# Altium PCB SO020100001_001.PcbDoc
Units mm, origin at the board's own origin, x right, y up, seen from the top; angles counter-clockwise.
Board outline 90 x 60 mm, 2 copper layers (Top Layer, Bottom Layer), stack 1.455 mm thick; 192 components, 104 nets, 470 pads, 27 vias.
Unrouted connection lines stored in the file: 164.
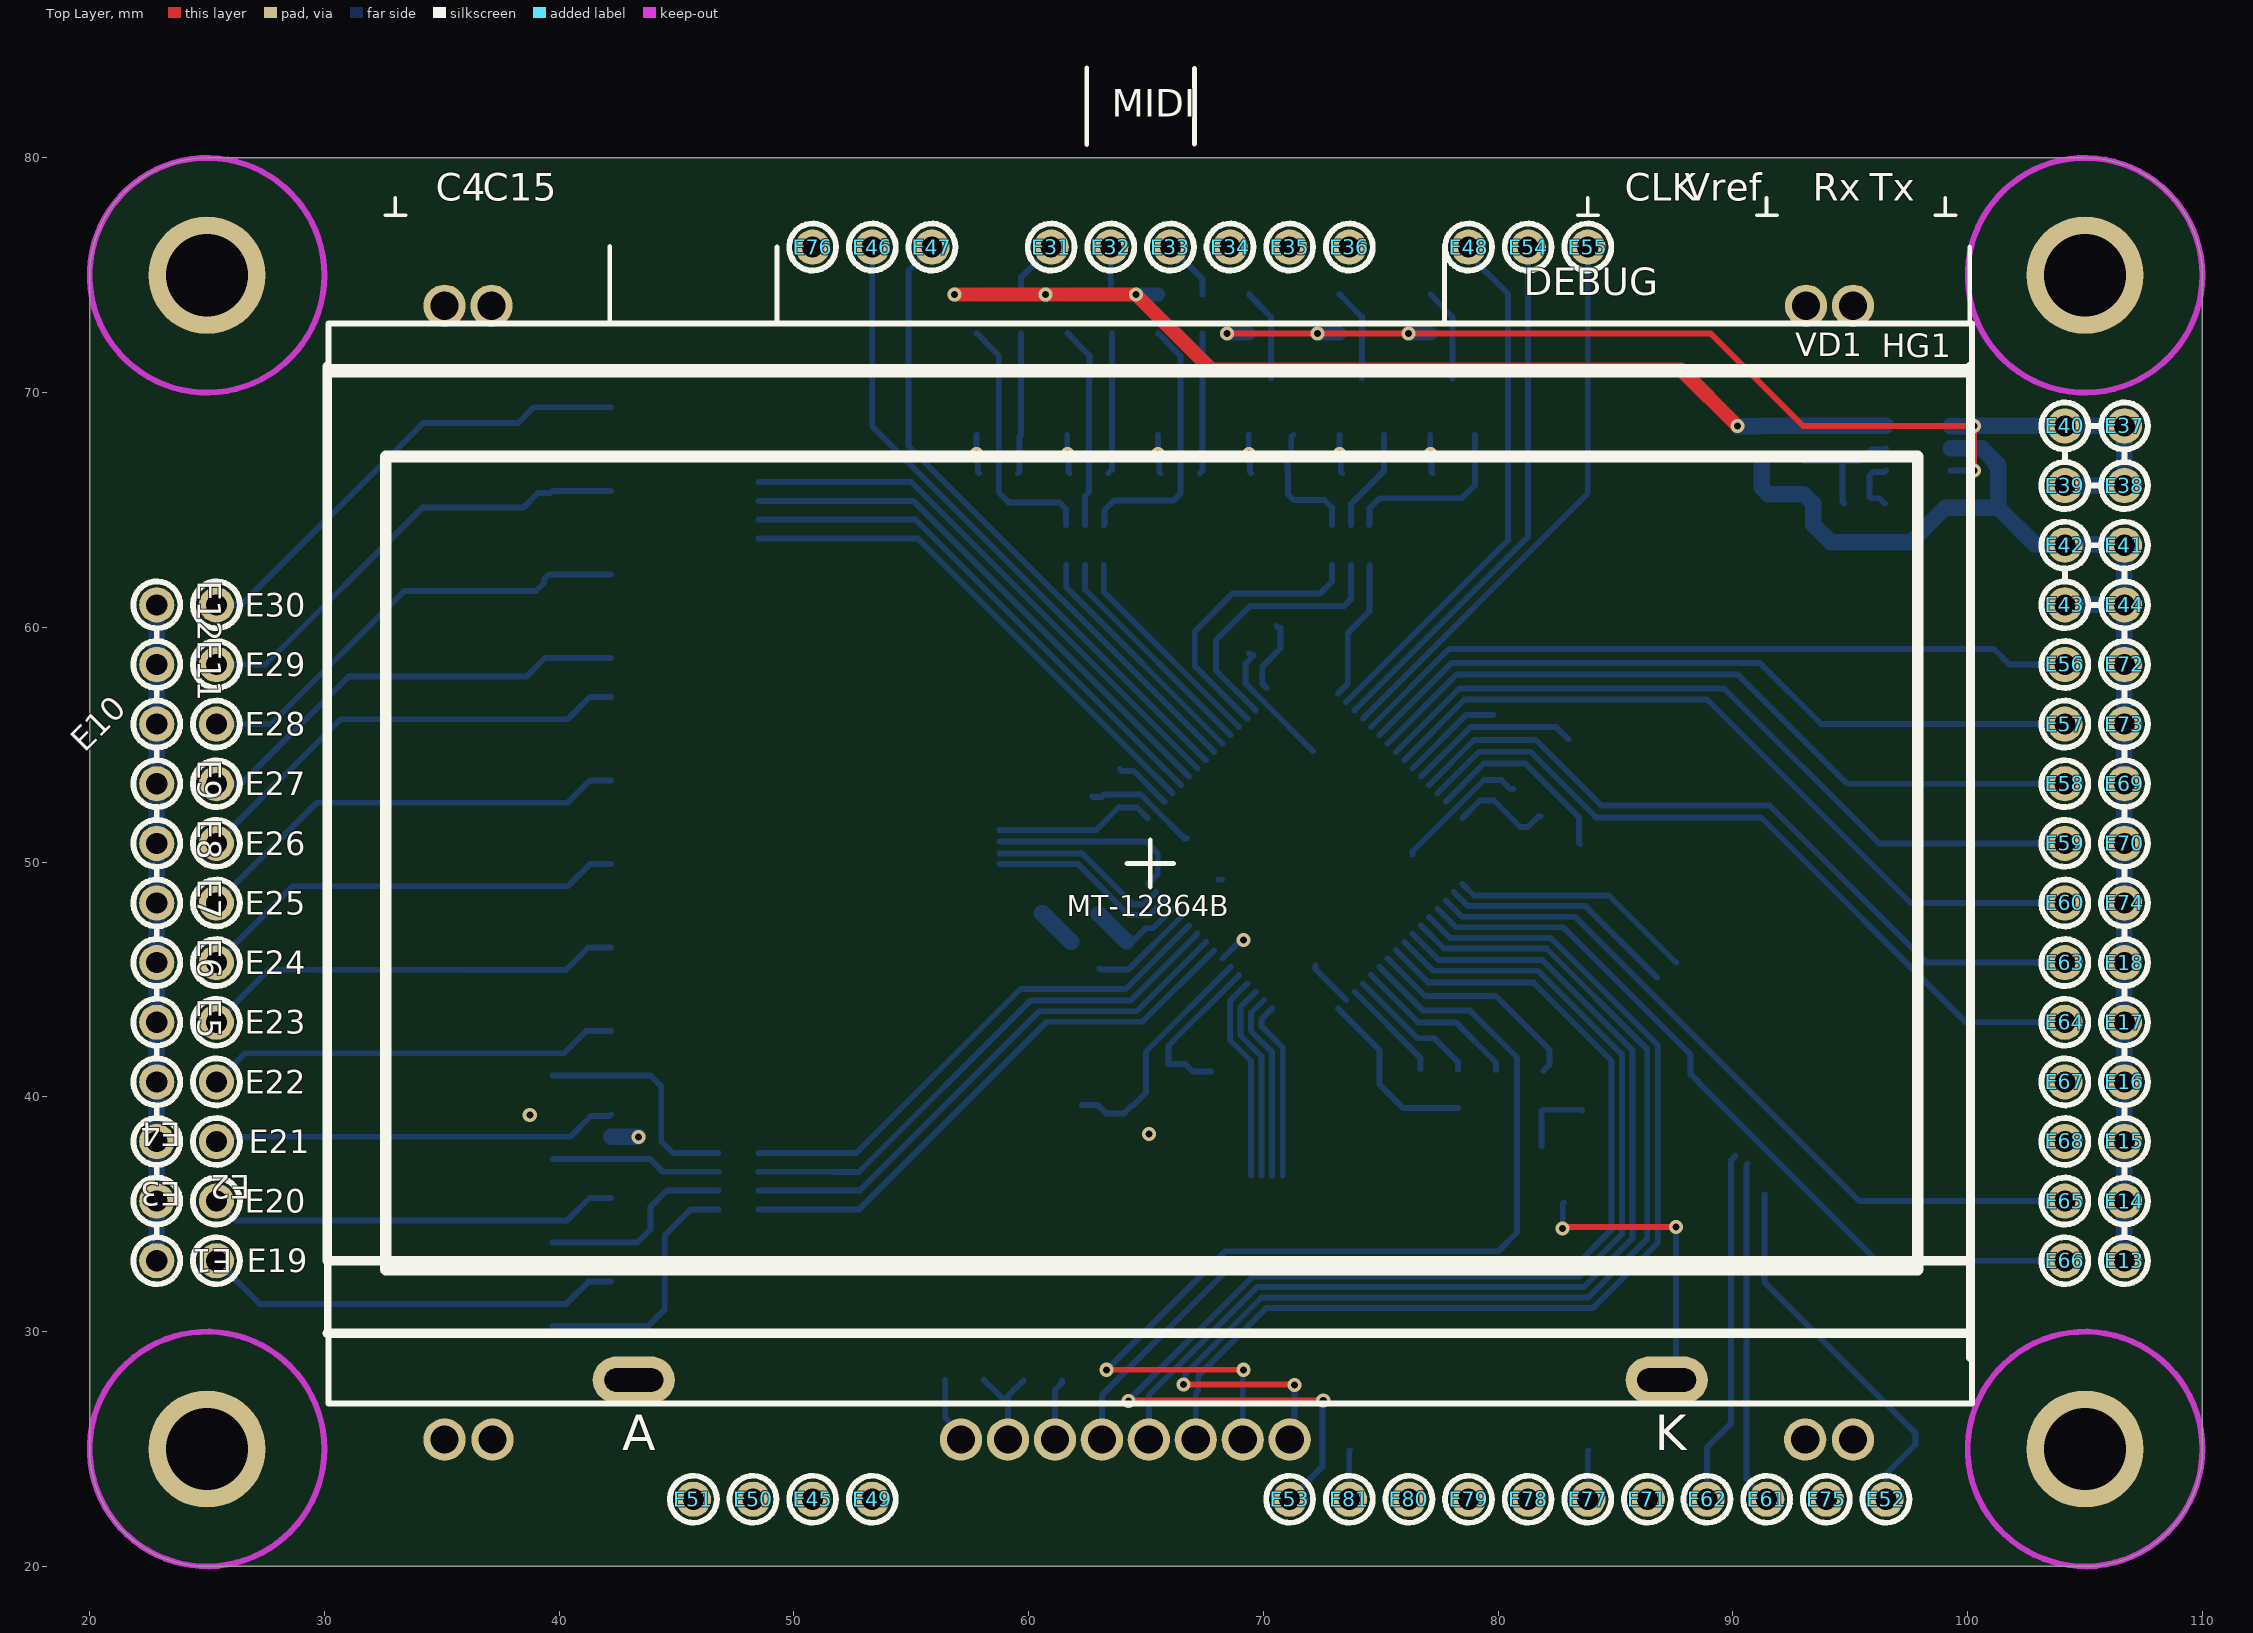
[diagram p0: Top Layer view]
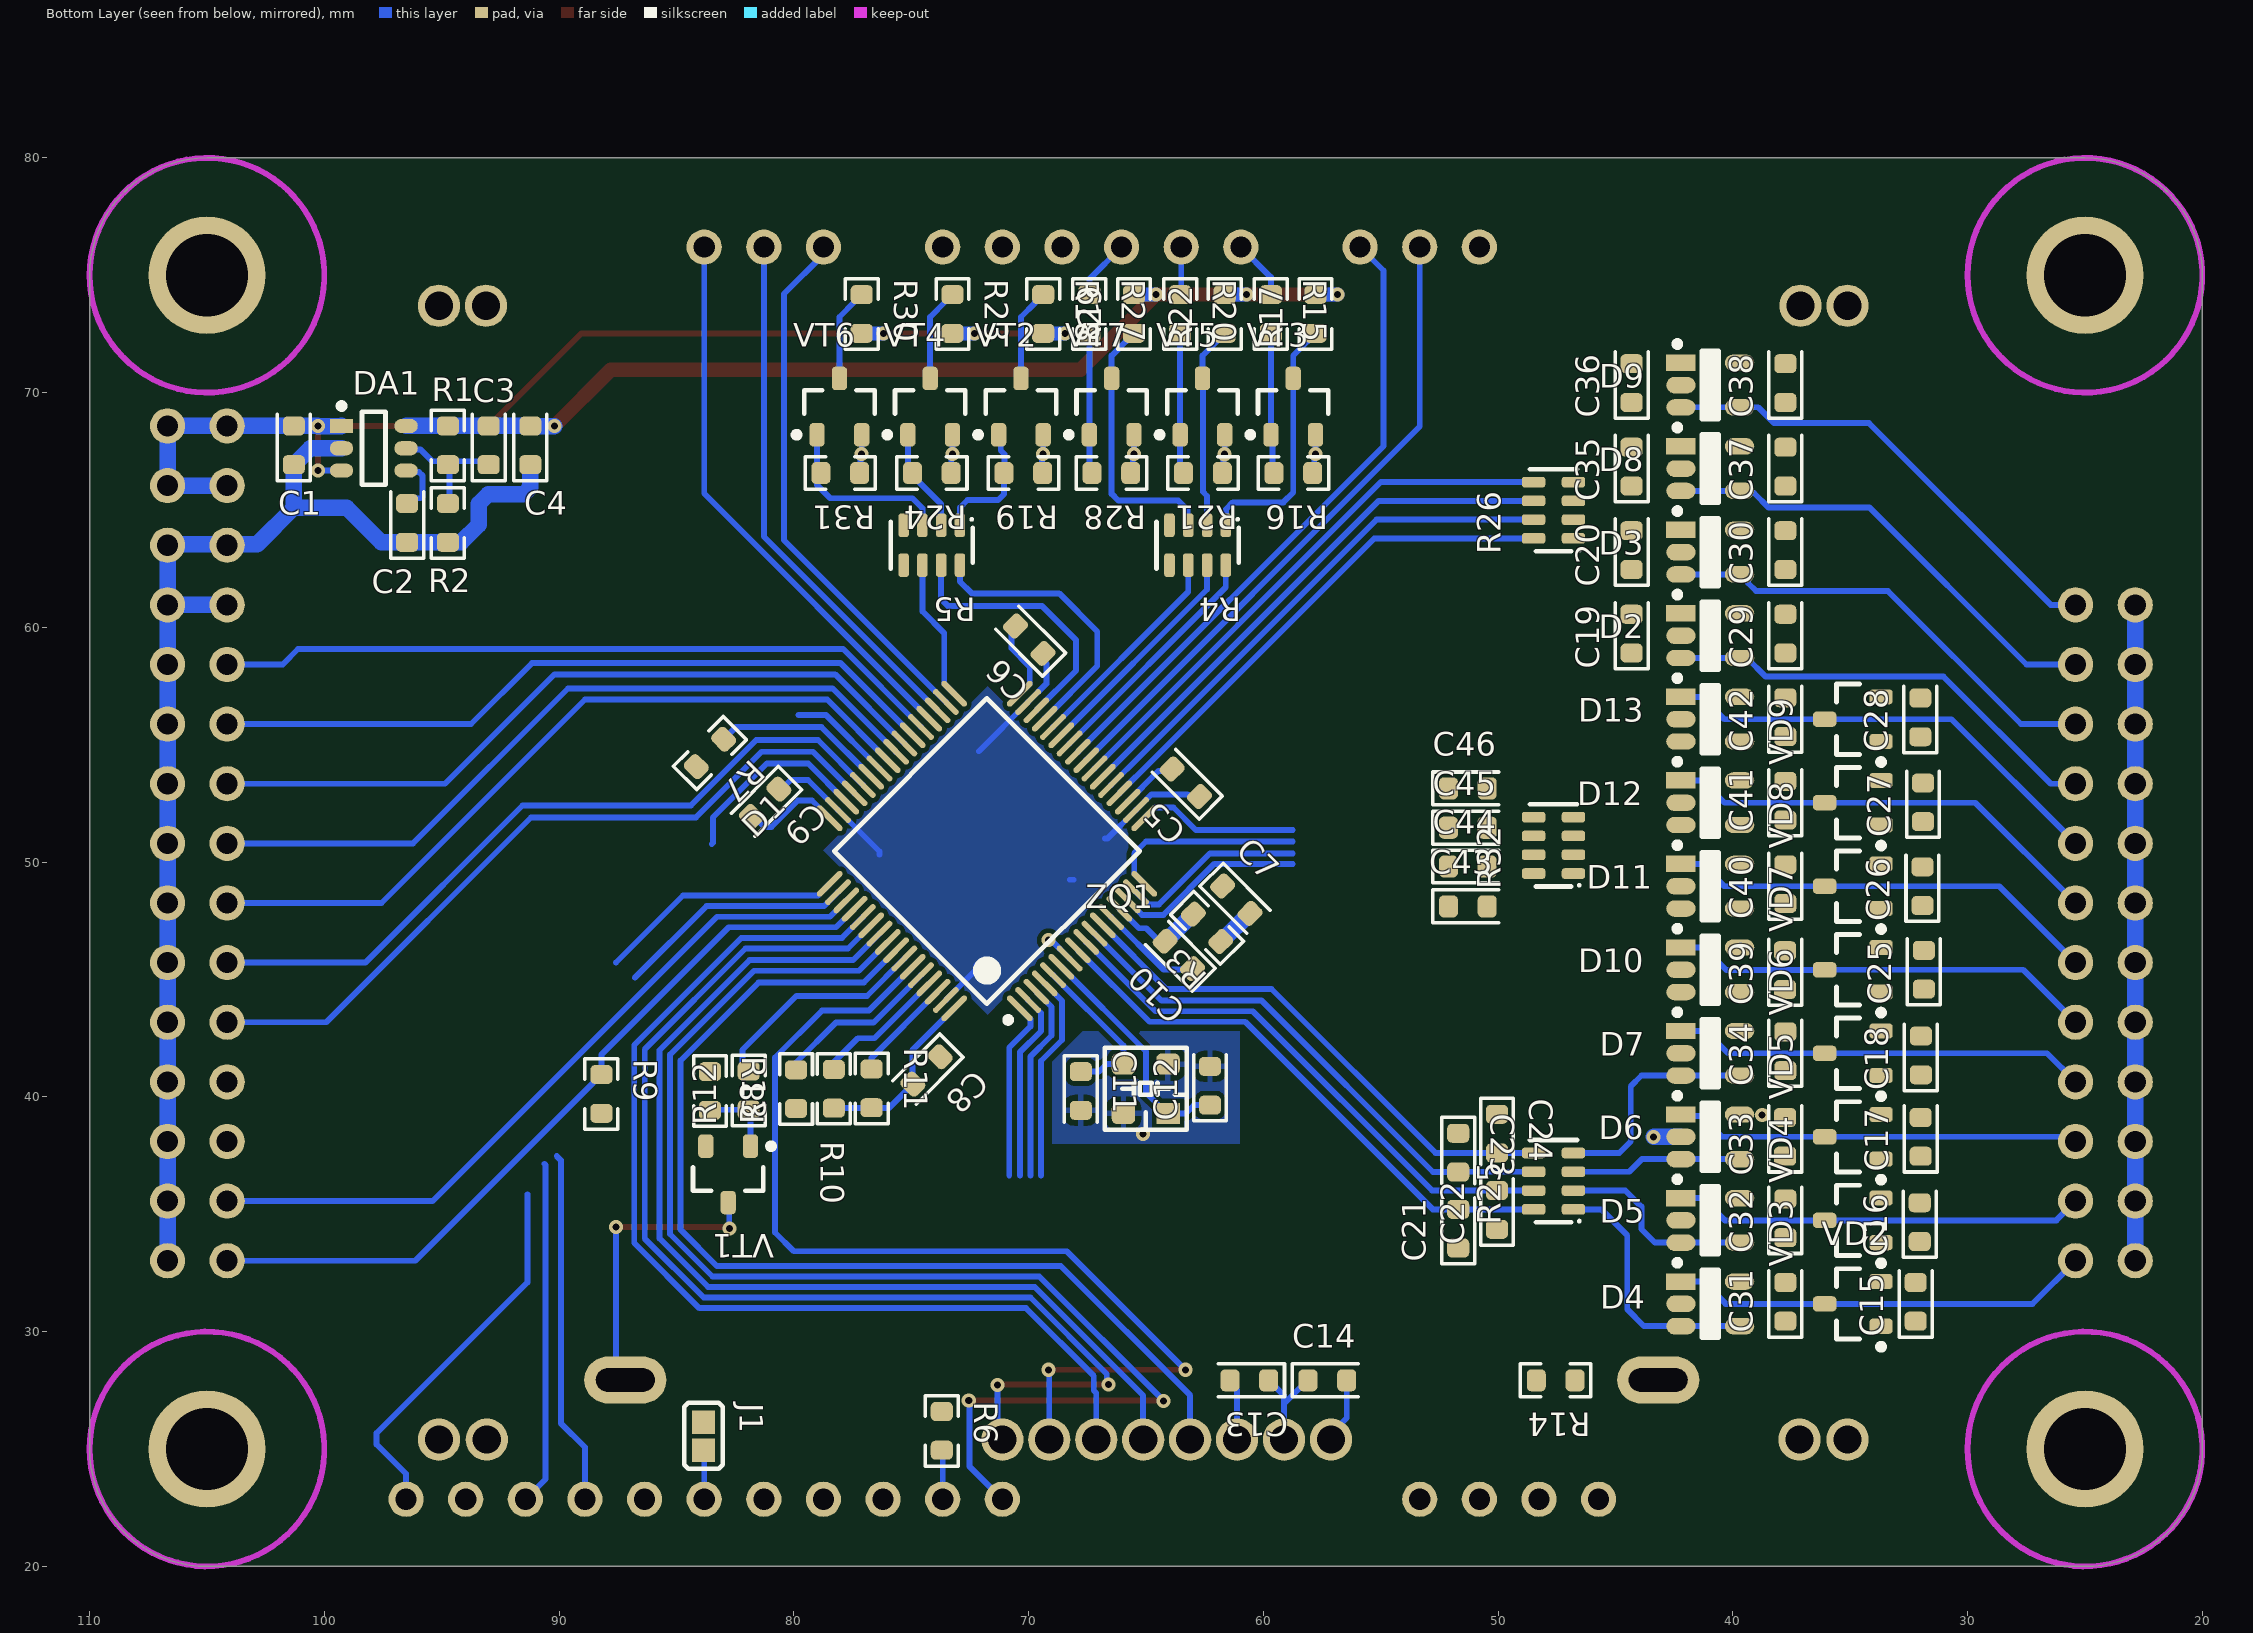
[diagram p1: Bottom Layer view, seen from below]
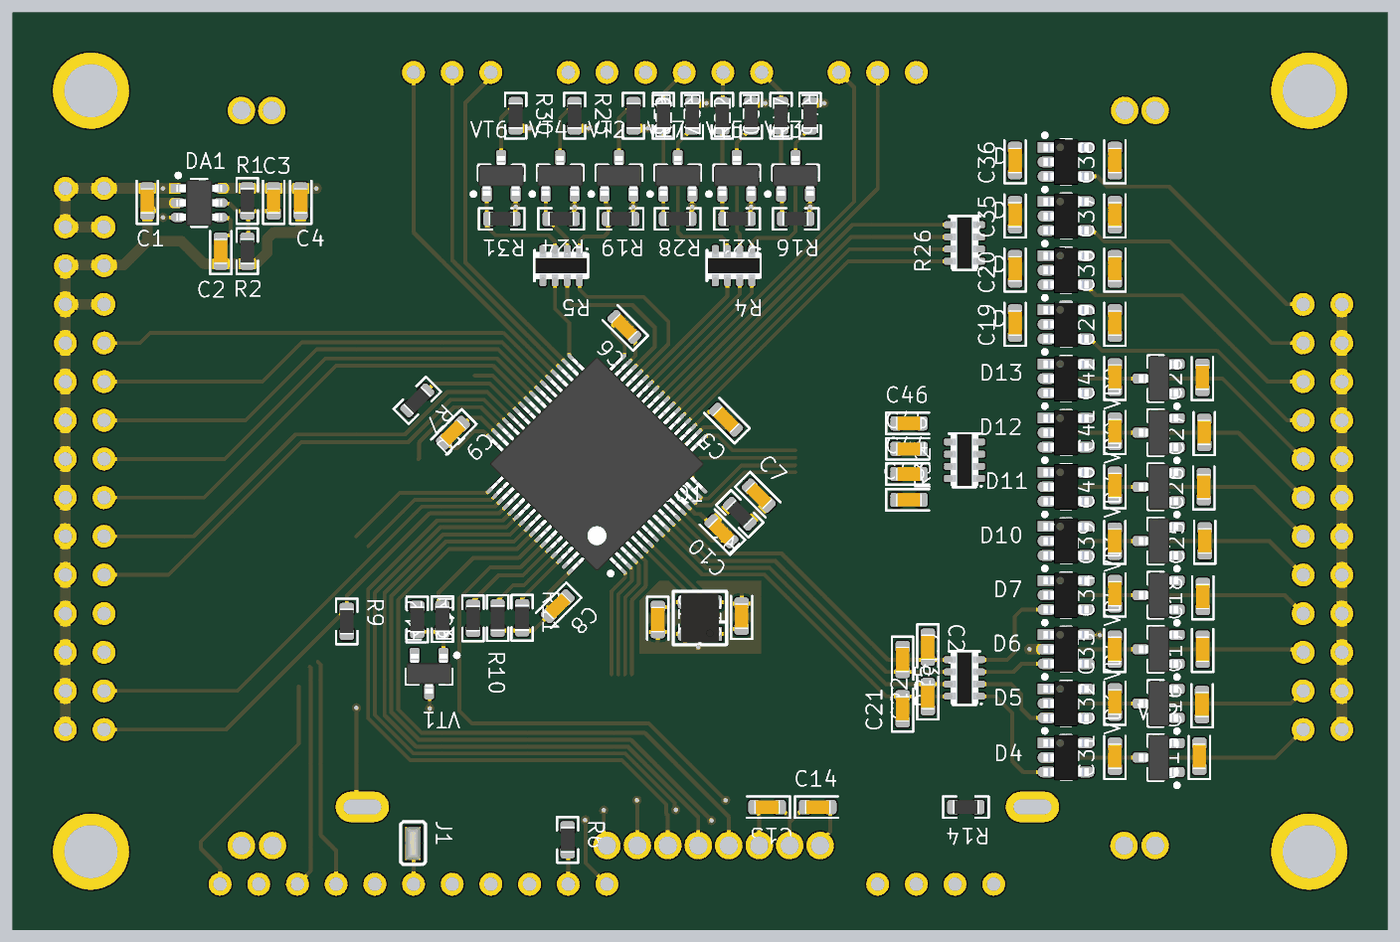
[diagram p2: 3D render of the assembled board from below, using the file's embedded part models]

## Layer stack, top to bottom
Top Solder: solder mask 0.0254, SM-001, Dk 4
Top Layer: signal copper 0.018
Dielectric 1: core 1.4186, Core-043, Dk 4.3
Bottom Layer: signal copper 0.018
Bottom Solder: solder mask 0.0254, SM-001, Dk 4

## Board outline
20,25 20,75 cw(c25,75) 25,80 105,80 cw(c105,75) 110,75 110,25 cw(c105,25) 105,20 25,20 cw(c25,25)

## Design rules (kind name [scope] priority, off if disabled: settings)
Clearance [All] p1: gap=0.2 ignorepadtopadclearanceinfootprint=FALSE
ComponentClearance [All] p1: gap=0.25 collisioncheckmode=3 verticalgap=0.254 showdistances=FALSE
DiffPairsRouting [All] p1: maxlimit=0.3 minlimit=0.25 mostfreqgap=0.25 toplayer_minwidth=0.2 toplayer_maxwidth=0.3 toplayer_prefwidth=0.25 bottomlayer_minwidth=0.2 bottomlayer_maxwidth=0.3 bottomlayer_prefwidth=0.25 maxuncoupledlength=12.7
Height [All] p1: minheight=0 maxheight=30 prefheight=12.7
HoleSize [All] p1: absolutevalues=TRUE maxlimit=10 minlimit=0.025 maxpercent=80.000 minpercent=20.000
PlaneClearance [All] p1: clearance=0.2
PlaneConnect [All] p1: planeconnectstyle=Direct reliefexpansion=0.508 reliefentries=4 reliefconductorwidth=0.254 reliefairgap=0.254
PolygonConnect [All] p1: thpad.connectstyle=Relief thpad.reliefconductorwidth=0.25 thpad.reliefentries=4 thpad.polygonreliefangle="90 Angle" thpad.airgapwidth=0.25 smdpad.connectstyle=Relief smdpad.reliefconductorwidth=0.25 smdpad.reliefentries=4 smdpad.polygonreliefangle="90 Angle" smdpad.airgapwidth=0.25 via.connectstyle=Relief via.reliefconductorwidth=0.25 via.reliefentries=4 via.polygonreliefangle="90 Angle" via.airgapwidth=-0.1
RoutingCorners [All] p1: cornerstyle=45-Degree minsetback=1 maxsetback=2.5
RoutingVias [All] p1: holewidth=0.3 width=0.6 viastyle="Through Hole" minholewidth=0.3 minwidth=0.6 maxholewidth=0.3 maxwidth=0.6
SolderMaskExpansion [All] p1: expansion=0.102 istentingtop=FALSE
UnRoutedNet [All] p1: checkbadconnections=TRUE
Width [All] p1: maxlimit=3 minlimit=0.2 preferedwidth=0.3
22 further rules are at their usual default settings.

## Classes and differential pairs
component class main: C1 C2 C3 C4 C5 C6 C7 C8 C9 C10 C11 C12 C13 C14 D1 DA1 E1 E2 E3 E4 E5 E6 E7 E8 E9 E10 E11 E12 E13 E14 E15 E16 E17 E18 E19 E20 E21 E22 E23 E24 E25 E26 E27 E28 E29 E30 E31 E32 E33 E34 E35 E36 E37 E38 E39 E40 E41 E42 E43 E44 E45 E46 E47 E48 E49 E50 E51 E52 E53 E54 E55 E56 E57 E58 E59 E60 E61 E62 E63 E64 E65 E66 E67 E68 E69 E70 E71 E72 E73 E74 E75 E76 E77 E78 E79 E80 E81 HG1 J1 R1 R2 R3 R4 R5 R6 R7 R8 R9 R10 R11 R12 R13 R14 VD1 VT1 ZQ1
component class A1: C15 C16 C17 C18 C19 C20 C21 C22 C23 C24 C25 C26 C27 C28 C29 C30 C31 C32 C33 C34 C35 C36 C37 C38 C39 C40 C41 C42 C43 C44 C45 C46 D2 D3 D4 D5 D6 D7 D8 D9 D10 D11 D12 D13 R15 R16 R17 R18 R19 R20 R21 R22 R23 R24 R25 R26 R27 R28 R29 R30 R31 R32 VD2 VD3 VD4 VD5 VD6 VD7 VD8 VD9 VT2 VT3 VT4 VT5 VT6 VT7

## Components (designator, comment, footprint, x,y, rotation, side; value= is the part's Value field where it differs from the comment)
C1 "C0603_16v_1u" CAPC1608X08L 101.3,67.755 r90 bottom value="1 мкФ"
C2 "C0603_50v_0,01u" CAPC1608X08L 96.475,64.45 r90 bottom value="0.01 мкФ"
C3 "C0603_50v_15p" CAPC1608X08L 93,67.755 r90 bottom value="15 пФ"
C4 "C0603_16v_1u" CAPC1608X08L 91.225,67.755 r90 bottom value="1 мкФ"
C5 "C0603_50v_0,1u" CAPC1608X08L 63.301,53.381 r45 bottom value="0.1 мкФ"
C6 "C0603_50v_0,1u" CAPC1608X08L 69.975,59.475 r45 bottom value="0.1 мкФ"
C7 "C0603_50v_0,1u" CAPC1608X08L 61.15,48.4 r225 bottom value="0.1 мкФ"
C8 "C0603_50v_0,1u" CAPC1608X08L 74.35,41.125 r315 bottom value="0.1 мкФ"
C9 "C0603_50v_0,1u" CAPC1608X08L 81.225,52.525 r315 bottom value="0.1 мкФ"
C10 "C0603_50v_0,1u" CAPC1608X08L 63.599,46.048 r45 bottom value="0.1 мкФ"
C11 "C0603_50v_15p" CAPC1608X08L 67.775,40.25 r270 bottom value="15 пФ"
C12 "C0603_50v_15p" CAPC1608X08L 62.275,40.475 r90 bottom value="15 пФ"
C13 "C0603_50v_0,1u" CAPC1608X08L 60.6,27.925 r0 bottom value="0.1 мкФ"
C14 "C0603_50v_0,1u" CAPC1608X08L 57.275,27.925 r180 bottom value="0.1 мкФ"
C15 "C0603_16v_1u" CAPC1608X08L 32.215,31.271 r90 bottom value="1 мкФ"
C16 "C0603_16v_1u" CAPC1608X08L 32.04,34.665 r90 bottom value="1 мкФ"
C17 "C0603_16v_1u" CAPC1608X08L 32,38.3 r90 bottom value="1 мкФ"
C18 "C0603_16v_1u" CAPC1608X08L 31.99,41.765 r90 bottom value="1 мкФ"
C19 "C0603_16v_1u" CAPC1608X08L 44.315,59.734 r90 bottom value="1 мкФ"
C20 "C0603_16v_1u" CAPC1608X08L 44.315,63.292 r90 bottom value="1 мкФ"
C21 "C0603_16v_1u" CAPC1608X08L 51.7,34.385 r90 bottom value="1 мкФ"
C22 "C0603_16v_1u" CAPC1608X08L 50.05,35.185 r90 bottom value="1 мкФ"
C23 "C0603_16v_1u" CAPC1608X08L 51.7,37.625 r270 bottom value="1 мкФ"
C24 "C0603_16v_1u" CAPC1608X08L 50.05,38.435 r270 bottom value="1 мкФ"
C25 "C0603_16v_1u" CAPC1608X08L 31.863,45.415 r90 bottom value="1 мкФ"
C26 "C0603_16v_1u" CAPC1608X08L 31.925,48.975 r90 bottom value="1 мкФ"
C27 "C0603_16v_1u" CAPC1608X08L 31.9,52.55 r90 bottom value="1 мкФ"
C28 "C0603_16v_1u" CAPC1608X08L 32.015,56.165 r90 bottom value="1 мкФ"
C29 "C0603_50v_0,1u" CAPC1608X08L 37.765,59.734 r90 bottom value="0.1 мкФ"
C30 "C0603_50v_0,1u" CAPC1608X08L 37.765,63.292 r90 bottom value="0.1 мкФ"
C31 "C0603_50v_0,1u" CAPC1608X08L 37.765,31.271 r90 bottom value="0.1 мкФ"
C32 "C0603_50v_0,1u" CAPC1608X08L 37.765,34.829 r90 bottom value="0.1 мкФ"
C33 "C0603_50v_0,1u" CAPC1608X08L 37.775,38.3 r90 bottom value="0.1 мкФ"
C34 "C0603_50v_0,1u" CAPC1608X08L 37.765,41.945 r90 bottom value="0.1 мкФ"
C35 "C0603_16v_1u" CAPC1608X08L 44.315,66.85 r90 bottom value="1 мкФ"
C36 "C0603_16v_1u" CAPC1608X08L 44.315,70.408 r90 bottom value="1 мкФ"
C37 "C0603_50v_0,1u" CAPC1608X08L 37.765,66.85 r90 bottom value="0.1 мкФ"
C38 "C0603_50v_0,1u" CAPC1608X08L 37.765,70.408 r90 bottom value="0.1 мкФ"
C39 "C0603_50v_0,1u" CAPC1608X08L 37.775,45.4 r90 bottom value="0.1 мкФ"
C40 "C0603_50v_0,1u" CAPC1608X08L 37.765,49.06 r90 bottom value="0.1 мкФ"
C41 "C0603_50v_0,1u" CAPC1608X08L 37.765,52.618 r90 bottom value="0.1 мкФ"
C42 "C0603_50v_0,1u" CAPC1608X08L 37.765,56.176 r90 bottom value="0.1 мкФ"
C43 "C0603_16v_1u" CAPC1608X08L 51.29,48.115 r180 bottom value="1 мкФ"
C44 "C0603_16v_1u" CAPC1608X08L 51.29,49.815 r180 bottom value="1 мкФ"
C45 "C0603_16v_1u" CAPC1608X08L 51.29,51.465 r180 bottom value="1 мкФ"
C46 "C0603_16v_1u" CAPC1608X08L 51.29,53.14 r180 bottom value="1 мкФ"
D1 "STM32F091RB6" TSQFP50P_10x10_64N 71.774,50.473 r135 bottom
D2 "AMP" SOT23-5M 40.965,59.641 r180 bottom
D3 "AMP" SOT23-5M 40.965,63.199 r180 bottom
D4 "AMP" SOT23-5M 40.965,31.178 r180 bottom
D5 "AMP" SOT23-5M 40.965,34.735 r180 bottom
D6 "AMP" SOT23-5M 40.965,38.293 r180 bottom
D7 "AMP" SOT23-5M 40.965,41.851 r180 bottom
D8 "AMP" SOT23-5M 40.965,66.757 r180 bottom
D9 "AMP" SOT23-5M 40.965,70.315 r180 bottom
D10 "AMP" SOT23-5M 40.965,45.409 r180 bottom
D11 "AMP" SOT23-5M 40.965,48.967 r180 bottom
D12 "AMP" SOT23-5M 40.965,52.525 r180 bottom
D13 "AMP" SOT23-5M 40.965,56.083 r180 bottom
DA1 "TPS73001DBVT" SOT95P280X145-6N 97.895,67.63 r180 bottom
E1 "CON 0.9mm" con_0.9mm 22.86,33.02 r180 top
E2 "CON 0.9mm" con_0.9mm 22.86,35.56 r180 top
E3 "CON 0.9mm" con_0.9mm 22.86,38.1 r180 top
E4 "CON 0.9mm" con_0.9mm 22.86,40.64 r180 top
E5 "CON 0.9mm" con_0.9mm 22.86,43.18 r270 top
E6 "CON 0.9mm" con_0.9mm 22.86,45.72 r270 top
E7 "CON 0.9mm" con_0.9mm 22.86,48.26 r270 top
E8 "CON 0.9mm" con_0.9mm 22.86,50.8 r270 top
E9 "CON 0.9mm" con_0.9mm 22.86,53.34 r270 top
E10 "CON 0.9mm" con_0.9mm 22.86,55.88 r270 top
E11 "CON 0.9mm" con_0.9mm 22.86,58.42 r270 top
E12 "CON 0.9mm" con_0.9mm 22.86,60.96 r270 top
E13 "CON 0.9mm" con_0.9mm 106.68,33.02 r180 top
E14 "CON 0.9mm" con_0.9mm 106.68,35.56 r180 top
E15 "CON 0.9mm" con_0.9mm 106.68,38.1 r180 top
E16 "CON 0.9mm" con_0.9mm 106.68,40.64 r180 top
E17 "CON 0.9mm" con_0.9mm 106.68,43.18 r180 top
E18 "CON 0.9mm" con_0.9mm 106.68,45.72 r180 top
E19 "CON 0.9mm" con_0.9mm 25.4,33.02 r0 top
E20 "CON 0.9mm" con_0.9mm 25.4,35.56 r0 top
E21 "CON 0.9mm" con_0.9mm 25.4,38.1 r0 top
E22 "CON 0.9mm" con_0.9mm 25.4,40.64 r0 top
E23 "CON 0.9mm" con_0.9mm 25.4,43.18 r0 top
E24 "CON 0.9mm" con_0.9mm 25.4,45.72 r0 top
E25 "CON 0.9mm" con_0.9mm 25.4,48.26 r0 top
E26 "CON 0.9mm" con_0.9mm 25.4,50.8 r0 top
E27 "CON 0.9mm" con_0.9mm 25.4,53.34 r0 top
E28 "CON 0.9mm" con_0.9mm 25.4,55.88 r0 top
E29 "CON 0.9mm" con_0.9mm 25.4,58.42 r0 top
E30 "CON 0.9mm" con_0.9mm 25.4,60.96 r0 top
E31 "CON 0.9mm" con_0.9mm 60.96,76.2 r0 top
E32 "CON 0.9mm" con_0.9mm 63.5,76.2 r0 top
E33 "CON 0.9mm" con_0.9mm 66.04,76.2 r0 top
E34 "CON 0.9mm" con_0.9mm 68.58,76.2 r0 top
E35 "CON 0.9mm" con_0.9mm 71.12,76.2 r0 top
E36 "CON 0.9mm" con_0.9mm 73.66,76.2 r0 top
E37 "CON 0.9mm" con_0.9mm 106.68,68.58 r90 top
E38 "CON 0.9mm" con_0.9mm 106.68,66.04 r0 top
E39 "CON 0.9mm" con_0.9mm 104.14,66.04 r0 top
E40 "CON 0.9mm" con_0.9mm 104.14,68.58 r0 top
E41 "CON 0.9mm" con_0.9mm 106.68,63.5 r0 top
E42 "CON 0.9mm" con_0.9mm 104.14,63.5 r90 top
E43 "CON 0.9mm" con_0.9mm 104.14,60.96 r0 top
E44 "CON 0.9mm" con_0.9mm 106.68,60.96 r0 top
E45 "CON 0.9mm" con_0.9mm 50.8,22.86 r270 top
E46 "CON 0.9mm" con_0.9mm 53.34,76.2 r270 top
E47 "CON 0.9mm" con_0.9mm 55.88,76.2 r270 top
E48 "CON 0.9mm" con_0.9mm 78.74,76.2 r270 top
E49 "CON 0.9mm" con_0.9mm 53.34,22.86 r270 top
E50 "CON 0.9mm" con_0.9mm 48.26,22.86 r270 top
E51 "CON 0.9mm" con_0.9mm 45.72,22.86 r270 top
E52 "CON 0.9mm" con_0.9mm 96.52,22.86 r270 top
E53 "CON 0.9mm" con_0.9mm 71.12,22.86 r270 top
E54 "CON 0.9mm" con_0.9mm 81.28,76.2 r270 top
E55 "CON 0.9mm" con_0.9mm 83.82,76.2 r270 top
E56 "CON 0.9mm" con_0.9mm 104.14,58.42 r180 top
E57 "CON 0.9mm" con_0.9mm 104.14,55.88 r180 top
E58 "CON 0.9mm" con_0.9mm 104.14,53.34 r180 top
E59 "CON 0.9mm" con_0.9mm 104.14,50.8 r180 top
E60 "CON 0.9mm" con_0.9mm 104.14,48.26 r180 top
E61 "CON 0.9mm" con_0.9mm 91.44,22.86 r0 top
E62 "CON 0.9mm" con_0.9mm 88.9,22.86 r0 top
E63 "CON 0.9mm" con_0.9mm 104.14,45.72 r180 top
E64 "CON 0.9mm" con_0.9mm 104.14,43.18 r180 top
E65 "CON 0.9mm" con_0.9mm 104.14,35.56 r180 top
E66 "CON 0.9mm" con_0.9mm 104.14,33.02 r180 top
E67 "CON 0.9mm" con_0.9mm 104.14,40.64 r270 top
E68 "CON 0.9mm" con_0.9mm 104.14,38.1 r270 top
E69 "CON 0.9mm" con_0.9mm 106.68,53.34 r0 top
E70 "CON 0.9mm" con_0.9mm 106.68,50.8 r0 top
E71 "CON 0.9mm" con_0.9mm 86.36,22.86 r0 top
E72 "CON 0.9mm" con_0.9mm 106.68,58.42 r0 top
E73 "CON 0.9mm" con_0.9mm 106.68,55.88 r0 top
E74 "CON 0.9mm" con_0.9mm 106.68,48.26 r0 top
E75 "CON 0.9mm" con_0.9mm 93.98,22.86 r0 top
E76 "CON 0.9mm" con_0.9mm 50.8,76.2 r0 top
E77 "CON 0.9mm" con_0.9mm 83.82,22.86 r0 top
E78 "CON 0.9mm" con_0.9mm 81.28,22.86 r0 top
E79 "CON 0.9mm" con_0.9mm 78.74,22.86 r0 top
E80 "CON 0.9mm" con_0.9mm 76.2,22.86 r0 top
E81 "CON 0.9mm" con_0.9mm 73.66,22.86 r0 top
HG1 "MT-12864" MT-12864 65.12,49.7 r0 top locked
J1 "Jumper_1x1" "jumper 1x1" 83.85,25.55 r270 bottom
R1 "RES0603_51k" RESC1608X04N 94.737,67.755 r90 bottom value="51 кОм"
R2 "RES0603_30k±1%" RESC1608X04N 94.737,64.45 r90 bottom value="30 кОм"
R3 "RES0603_100r" RESC1608X04N 62.4,47.2 r45 bottom value="100 Ом"
R4 "CAT16-470J4" CAC-80P320X160-8N 62.8,63.5 r0 bottom value="47 Ом"
R5 "CAT16-470J4" CAC-80P320X160-8N 74.125,63.5 r0 bottom value="47 Ом"
R6 "RES0603_10k" RESC1608X04N 73.7,25.775 r270 bottom value="10 кОм"
R7 "RES0603_10k" RESC1608X04N 83.575,54.65 r315 bottom value="10 кОм"
R8 "RES0603_10k" RESC1608X04N 79.906,40.328 r90 bottom value="10 кОм"
R9 "RES0603_10k" RESC1608X04N 88.2,40.125 r270 bottom value="10 кОм"
R10 "RES0603_10k" RESC1608X04N 78.297,40.346 r270 bottom value="10 кОм"
R11 "RES0603_10k" RESC1608X04N 76.689,40.363 r270 bottom value="10 кОм"
R12 "RES0603_47R" RESC1608X04N 81.925,40.275 r90 bottom value="47 Ом"
R13 "RES0603_10k" RESC1608X04N 83.575,40.25 r270 bottom value="10 кОм"
R14 "RES0603_47R" RESC1608X04N 47.55,27.925 r0 bottom value="47 Ом"
R15 "RES0603_100r" RESC1608X04N 59.68,73.35 r270 bottom value="100 Ом"
R16 "RES0603_10k" RESC1608X04N 58.725,66.575 r0 bottom value="10 кОм"
R17 "RES0603_10k" RESC1608X04N 57.78,73.35 r90 bottom value="10 кОм"
R18 "RES0603_10k" RESC1608X04N 69.378,73.35 r270 bottom value="10 кОм"
R19 "RES0603_10k" RESC1608X04N 70.225,66.575 r0 bottom value="10 кОм"
R20 "RES0603_100r" RESC1608X04N 63.546,73.35 r270 bottom value="100 Ом"
R21 "RES0603_10k" RESC1608X04N 62.575,66.575 r0 bottom value="10 кОм"
R22 "RES0603_10k" RESC1608X04N 61.646,73.35 r90 bottom value="10 кОм"
R23 "RES0603_10k" RESC1608X04N 73.244,73.35 r270 bottom value="10 кОм"
R24 "RES0603_10k" RESC1608X04N 74.125,66.575 r0 bottom value="10 кОм"
R25 "CAT16-470J4" CAC-80P320X160-8N 47.64,36.41 r90 bottom value="47 Ом"
R26 "CAT16-470J4" CAC-80P320X160-8N 47.64,64.99 r90 bottom value="47 Ом"
R27 "RES0603_100r" RESC1608X04N 67.412,73.35 r270 bottom value="100 Ом"
R28 "RES0603_10k" RESC1608X04N 66.475,66.575 r0 bottom value="10 кОм"
R29 "RES0603_10k" RESC1608X04N 65.512,73.35 r90 bottom value="10 кОм"
R30 "RES0603_10k" RESC1608X04N 77.11,73.35 r270 bottom value="10 кОм"
R31 "RES0603_10k" RESC1608X04N 78.025,66.575 r0 bottom value="10 кОм"
R32 "CAT16-470J4" CAC-80P320X160-8N 47.64,50.715 r90 bottom value="47 Ом"
VD1 "S11-161A-5W" S11-161A-5W 65.18,49.94 r0 top locked
VD2 "BAV199" SOT95P245X110-3N 34.89,31.183 r90 bottom
VD3 "BAV199" SOT95P245X110-3N 34.89,34.741 r90 bottom
VD4 "BAV199" SOT95P245X110-3N 34.89,38.299 r90 bottom
VD5 "BAV199" SOT95P245X110-3N 34.89,41.857 r90 bottom
VD6 "BAV199" SOT95P245X110-3N 34.89,45.415 r90 bottom
VD7 "BAV199" SOT95P245X110-3N 34.89,48.973 r90 bottom
VD8 "BAV199" SOT95P245X110-3N 34.89,52.531 r90 bottom
VD9 "BAV199" SOT95P245X110-3N 34.89,56.089 r90 bottom
VT1 "IRLML2402" SOT95P245X110-3N 82.8,36.7 r0 bottom
VT2 "IRLML2402" SOT95P245X110-3N 70.328,69.405 r180 bottom
VT3 "IRLML2402" SOT95P245X110-3N 58.73,69.405 r180 bottom
VT4 "IRLML2402" SOT95P245X110-3N 74.194,69.405 r180 bottom
VT5 "IRLML2402" SOT95P245X110-3N 62.596,69.405 r180 bottom
VT6 "IRLML2402" SOT95P245X110-3N 78.06,69.405 r180 bottom
VT7 "IRLML2402" SOT95P245X110-3N 66.462,69.405 r180 bottom
ZQ1 "TX3 12.0000 MHZ" CDFN/DFN 65.011,40.347 r90 bottom

## Footprints (in the part's own frame and the unit in brackets; to place one, negate y for a bottom-side part, rotate by r counter-clockwise, add the part's x,y. Pads: shape width x height; smd on the part's side, far side on the other; paste and mask are expansions set on the pad)
CAC-80P320X160-8N [mm] "Chip Array, Concave, 8-Leads, Pitch 0,80mm,  Body 3,20x1,60mm,  IPC Medium Density"
  rrect50% 0.45x1 smd: 1(-1.2,-0.85) 2(-0.4,-0.85) 3(0.4,-0.85) 4(1.2,-0.85) 5(1.2,0.85) 6(0.4,0.85) 7(-0.4,0.85) 8(-1.2,0.85)
  silkscreen extent -1.75,-1.15 1.75,1, body extent -1.7,-0.95 1.7,0.95, height 0.8
CAPC1608X08L [mm] "Chip Capacitor, 0603"
  rrect50% 0.81x0.94 smd: 1(-0.825,0) 2(0.825,0)
  silkscreen extent -1.5,-0.7 1.33,0.7, body extent -0.85,-0.45 0.85,0.45, height 0.8
CDFN/DFN [mm] "CDFN/DFN кваарц 2,5х3,2"
  rect 0.9x1 smd: 1(-1.05,-0.95)
  rrect50% 0.9x1 smd: 2(1.05,-0.95) 3(1.05,0.95) 4(-1.05,0.95)
  silkscreen extent -1.75,-1.75 1.75,1.75, body extent -1.6,-1.25 1.6,1.25, height 0.9
con_0.9mm [mm] "контактное соединение 0,9мм"
  round 1.5 hole 0.9: 1(0,0)
  silkscreen extent -1,-1 1,1
"jumper 1x1" [mm] "перемычка 1мм"
  rect 1x1 smd paste-1 mask+0.13: 1(-0.6,0) 2(0.6,0)
  silkscreen extent -1.42,-0.82 1.39,0.82, body extent -1.1,-0.5 1.1,0.5, height 0.5
MT-12864 [mm] "ЖКИ"
  round 1.8 hole 1.2: 1(6,-24.3) 2(4,-24.3) 3(2,-24.3) 4(0,-24.3) 5(-2,-24.3) 6(-4,-24.3) 7(-6,-24.3) 8(-8,-24.3) A(-30,24) A(-30,-24.3) A(-28,24) A(-27.956,-24.3) A(27.96,-24.3) A(28,24) A(30,-24.3) A(30,24)
  silkscreen extent -35,-20.8 35,21.42, body extent -35,-24.8 35,24.5, height 7
RESC1608X04N [mm] "Chip Resistor, 0603"
  rrect50% 0.81x0.94 smd: 1(-0.825,0) 2(0.825,0)
  silkscreen extent -1.5,-0.7 1.5,0.7, body extent -0.85,-0.45 0.85,0.45, height 0.45
S11-161A-5W [mm]
  oval 3.5x2 hole 1 slot 2.5 at 0 deg: 1(22,-22) 2(-22,-22)
  silkscreen extent -35,-23 35,23, body extent -35,-23 35,23, height 3
SOT23-5M [mm]
  rect 1.25x0.7 smd: 1(-1.25,0.956)
  oval 1.25x0.7 smd: 2(-1.25,0.006) 3(-1.25,-0.944) 4(1.25,-0.944) 5(1.25,0.956)
  silkscreen extent -1.52,-1.44 0.35,1.88, body extent -1.5,-1.5 1.5,1.5, height 1.3
SOT95P245X110-3N [mm] "SOT23, 3-Leads, Body 2,90x2,45mm, Pitch 0,95mm, IPC Medium Density"
  rrect50% 0.65x1 smd: 1(-0.95,-1.2) 2(0.95,-1.2) 3(0,1.2)
  silkscreen extent -1.95,-1.32 1.5,0.7, body extent -1.5,-1.3 1.5,1.3, height 1.1
SOT95P280X145-6N [mm] "SOT23, 6-Leads, Body 2,90x2,80mm, Pitch 0,95mm, IPC Medium Density"
  rect 1x0.6 smd: 1(-1.375,0.95)
  oval 1x0.6 smd: 2(-1.375,0) 3(-1.375,-0.95) 4(1.375,-0.95) 5(1.375,0) 6(1.375,0.95)
  silkscreen extent -1.5,-1.55 0.5,1.92, body extent -1.5,-1.53 1.5,1.53, height 1.45
TSQFP50P_10x10_64N [mm] "TSQFP, 64-Leads, Body 10,00x10,00mm, Pitch 0,50mm, IPC Medium Density"
  oval 0.25x1.45 smd mask+0.05: 1(-3.75,-5.725) 2(-3.25,-5.725) 3(-2.75,-5.725) 4(-2.25,-5.725) 5(-1.75,-5.725) 6(-1.25,-5.725) 7(-0.75,-5.725) 8(-0.25,-5.725) 9(0.25,-5.725) 10(0.75,-5.725) 11(1.25,-5.725) 12(1.75,-5.725) 13(2.25,-5.725) 14(2.75,-5.725) 15(3.25,-5.725) 16(3.75,-5.725) 33(3.75,5.725) 34(3.25,5.725) 35(2.75,5.725) 36(2.25,5.725) 37(1.75,5.725) 38(1.25,5.725) 39(0.75,5.725) 40(0.25,5.725) 41(-0.25,5.725) 42(-0.75,5.725) 43(-1.25,5.725) 44(-1.75,5.725) 45(-2.25,5.725) 46(-2.75,5.725) 47(-3.25,5.725) 48(-3.75,5.725)
  oval 1.45x0.25 smd mask+0.05: 17(5.725,-3.75) 18(5.725,-3.25) 19(5.725,-2.75) 20(5.725,-2.25) 21(5.725,-1.75) 22(5.725,-1.25) 23(5.725,-0.75) 24(5.725,-0.25) 25(5.725,0.25) 26(5.725,0.75) 27(5.725,1.25) 28(5.725,1.75) 29(5.725,2.25) 30(5.725,2.75) 31(5.725,3.25) 32(5.725,3.75) 49(-5.725,3.75) 50(-5.725,3.25) 51(-5.725,2.75) 52(-5.725,2.25) 53(-5.725,1.75) 54(-5.725,1.25) 55(-5.725,0.75) 56(-5.725,0.25) 57(-5.725,-0.25) 58(-5.725,-0.75) 59(-5.725,-1.25) 60(-5.725,-1.75) 61(-5.725,-2.25) 62(-5.725,-2.75) 63(-5.725,-3.25) 64(-5.725,-3.75)
  silkscreen extent -4.6,-5.85 4.6,4.6, body extent -6,-6 6,6, height 1.2

## Part data
C1 C4 C15 C16 C17 C18 C19 C20 C21 C22 C23 C24 C25 C26 C27 C28 C35 C36 C43 C44 C45 C46: library part CMP-001-00002-10, "Чип 0603 16в 1мкФ", PlaceALL_value=1u, temp_range=-55...+155, Bom_name="ЧИП-0603-X7R-16 В-1 мкФ ±10%", d_type=X7R, dopusk=±10%, napr="16 В", PlaceALL_name=0603-X7R-1u, planar=1, type=0603
C2: library part CMP-00023-7, "Чип 0603 50в 0,01мкФ", PlaceALL_value=0.01u, temp_range=-55...+155, Bom_name="ЧИП-0603-X7R-50 В-0.01 мкФ ±10%", d_type=X7R, dopusk=±10%, napr="50 В", PlaceALL_name=0603-X7R-0.01u, planar=1, type=0603
C3 C11 C12: library part CMP-00114-2, "Чип 0603 50в 15 пФ", PlaceALL_value=15p, temp_range=-55...+155, Bom_name="ЧИП-0603-NP0-50 В-15 пФ ±5%", d_type=NP0, dopusk=±5%, napr="50 В", PlaceALL_name=0603-NP0-15p, planar=1, type=0603
C5 C6 C7 C8 C9 C10 C13 C14 C29 C30 C31 C32 C33 C34 C37 C38 C39 C40 C41 C42: library part CMP-001-00000-11, "Чип 0603 50в 0,1мкФ", PlaceALL_value=0.1u, temp_range=-55...+155, Bom_name="ЧИП-0603-X7R-50 В-0.1 мкФ ±10%", d_type=X7R, dopusk=±10%, napr="50 В", PlaceALL_name=0603-X7R-0.1u, planar=1, type=0603
D1: library part CMP-020-00004-4, "ARM®-based 32-bit MCU, up to 256 KB Flash", temp_range=-40…+150, Bom_name=STM32F091RB6, planar=1
D2 D3 D4 D5 D6 D7 D8 D9 D10 D11 D12 D13: library part LMV321IDBVR, "ОУ", name=LMV321IDBVR
DA1: library part TPS73001, "TPS730 Low-Noise, High PSRR, RF, 200-mA Low-Dropout Linear Regulators", name=TPS73001DBVT, type=Микросхемы
E1 E2 E3 E4 E5 E6 E7 E8 E9 E10 E11 E12 E13 E14 E15 E16 E17 E18 E19 E20 E21 E22 E23 E24 E25 E26 E27 E28 E29 E30 E31 E32 E33 E34 E35 E36 E37 E38 E39 E40 E41 E42 E43 E44 E45 E46 E47 E48 E49 E50 E51 E52 E53 E54 E55 E56 E57 E58 E59 E60 E61 E62 E63 E64 E65 E66 E67 E68 E69 E70 E71 E72 E73 E74 E75 E76 E77 E78 E79 E80 E81: library part CMP-00028-00014-2, "Контакт 0,9мм"
HG1: library part CMP-00308-1, "LCD индикатор MT-12864", temp_range=-20…+70, Bom_name=MT-12864, planar=1
J1: library part CMP-00028-00000-7, "Перемычка под пайку 1мм"
R1: library part CMP-00183-1, "Чип 0603 51 кОм", PlaceALL_value=51k, temp_range=-55...+155, Bom_name="ЧИП-0603 -51 кОм ±5%", dopusk=±5%, PlaceALL_name=0603-51k, planar=1, type=0603
R2: library part CMP-00131-1, "Чип 0603 30 кОм", PlaceALL_value=30k, temp_range=-55...+155, Bom_name="ЧИП-0603 -30 кОм ±1%", dopusk=±1%, PlaceALL_dopusk=±1%, PlaceALL_name="0603-30k ±1%", planar=1, type=0603
R3 R15 R20 R27: library part CMP-00024-9, "Чип 0603 100 Ом", PlaceALL_value=100r, temp_range=-55...+155, Bom_name="ЧИП-0603 -100 Ом ±5%", dopusk=±5%, PlaceALL_name=0603-100r, planar=1, type=0603
R4 R5 R25 R26 R32: library part CMP-00001-8, "Сборка 47 Ом", temp_range=-55...+155, Bom_name=CAT16-470J4, dopusk=±5%, PlaceALL_name=CAT16-470J4, planar=1
R6 R7 R8 R9 R10 R11 R13 R16 R17 R18 R19 R21 R22 R23 R24 R28 R29 R30 R31: library part CMP-00004-13, "Чип 0603 10 кОм", PlaceALL_value=10k, temp_range=-55...+155, Bom_name="ЧИП-0603 -10 кОм ±5%", dopusk=±5%, PlaceALL_name=0603-10k, planar=1, type=0603
R12 R14: library part CMP-00003-13, "Чип 0603 47 Ом", PlaceALL_value=47r, temp_range=-55...+155, Bom_name="ЧИП-0603 -47 Ом ±5%", dopusk=±5%, PlaceALL_name=0603-47r, planar=1, type=0603
VD1: library part CMP-00309-2, "Светодиод зелёный 5mm", temp_range=-65...+175, Bom_name="Светодиод S11-161A-5W", planar=1
VD2 VD3 VD4 VD5 VD6 VD7 VD8 VD9: library part CMP-004-00001-6, "Диодная сборка BAV199", temp_range=-40…+150, Bom_name="Диод BAV199", ComponentLink1URL=https://assets.nexperia.com/documents/data-sheet/BAV199.pdf, PlaceALL_name=BAV199, planar=1
VT1: library part CMP-00035-2, "sot-23 HEXFET MOSFET", temp_range=-55…+150, Bom_name="Транзистор IRLML2402TR", planar=1
VT2 VT3 VT4 VT5 VT6 VT7: library part CMP-00035-3, "sot-23 HEXFET MOSFET", temp_range=-55…+150, Bom_name="Транзистор IRLML2402TR", PlaceALL_name=IRLML2402, planar=1
ZQ1: library part CMP-003-00004-4, "Кварцевый резонатор 12 МГц", temp_range=-20…+70, Bom_name="Резонатор кварцевый TX3 12.0000 MHz", PlaceALL_name="TX3 12.0000 MHZ", planar=1

## Free pads (board coordinates)
  round 5 hole 3.5: 22(25,25) 22(25,75) 22(105,25) 22(105,75)

## Via types
v1: diameter 0.6, hole 0.3, Top Layer to Bottom Layer, tented both sides, 27 vias

## Nets (pads, with @x,y where several pads share a name; then routed paths per layer and width w, separated by ;. In a path a pad name is that pad's centre, name@x,y a point inside that pad or via, vN(x,y) a via of type N, cw(c..) or ccw(c..) an arc to the next point about the centre after c; other vN are vias at no path point)
A0: D1.53 HG1.3 | length 45.1
  Bottom Layer w0.25: HG1.3 67.12,27.386 67.225,27.491 67.225,28.116 70.109,31 84.025,31 86.8,33.775 86.8,42.211 82.244,46.767 77.955,46.767 D1.53
A_IN0: C43.2 D1.14 R32.8 | length 8.2
  Bottom Layer w0.25: 58.75,49.925 62.089,49.925 64.261,47.752 65.164,47.752 D1.14
A_IN1: C44.2 D1.15 R32.7 | length 7.8
  Bottom Layer w0.25: 58.75,50.375 62.275,50.375 64.448,48.202 64.907,48.202 D1.15
A_IN2: C45.2 D1.16 R32.6 | length 8.4
  Bottom Layer w0.25: 58.75,50.875 65,50.875 65.5,50.375 65.5,49.502 D1.16
A_IN3: C46.2 D1.17 R32.5 | length 6.9
  Bottom Layer w0.25: 58.75,51.368 62.875,51.368 63.832,52.325 64.619,52.325 D1.17
A_IN4: C21.2 D1.8 R25.8 | length 24
  Bottom Layer w0.25: R25.8 C21.2 52.785,35.21 60.775,43.2 64.855,43.2 D1.8
A_IN5: C22.2 D1.9 R25.7 | length 23.4
  Bottom Layer w0.25: R25.7 C22.2 52.81,36.01 60.45,43.65 64.598,43.65 D1.9
A_IN6: C23.2 D1.10 R25.6 | length 22.9
  Bottom Layer w0.25: R25.6 51.69,36.81 C23.2 52.775,36.8 60.075,44.1 64.34,44.1 D1.10
A_IN7: C24.2 D1.11 R25.5 | length 22.4
  Bottom Layer w0.25: R25.5@48.525,37.575 R25.5 C24.2 52.66,37.61 59.65,44.6 64.133,44.6 D1.11
A_OUT0: D1.20 R26.8 | length 22.1
  Bottom Layer w0.25: R26.8 55.275,63.79 64.68,54.385 D1.20
A_OUT1: D1.21 R26.7 | length 22.7
  Bottom Layer w0.25: R26.7 55.182,64.59 65.175,54.597 D1.21
A_OUT2: D1.22 R26.6 | length 23.2
  Bottom Layer w0.25: R26.6 55.089,65.39 D1.22
A_OUT3: D1.23 R26.5 | length 23.8
  Bottom Layer w0.25: R26.5 54.996,66.19 D1.23
BOOT: D1.60 R8.2 | length 7.2
  Bottom Layer w0.25: D1.60 76.61,43.162 78.213,43.162 79.906,41.469 R8.2
C\S\: D1.54 HG1.1 | length 49.6
  Top Layer w0.25: v1(66.6,27.75) 71.3,27.75 v1(71.325,27.725)
  Bottom Layer w0.25: v1(66.6,27.75) 66.67,27.82 66.67,28.197 69.923,31.45 83.839,31.45 86.35,33.961 86.35,42.025 82.058,46.317 77.698,46.317 D1.54 ; HG1.1 71.325,25.605 v1(71.325,27.725)
D_IN0: R4.1 R17.1 VT3.3 | length 11
  Bottom Layer w0.25: R17.1 57.803,72.525 58.125,72.203 58.125,72.18 58.725,71.58 58.725,70.61 VT3.3 58.73,65.745 59.15,65.325 61.3,65.325 61.593,65.032 61.593,64.357 R4.1
D_IN1: R4.2 R22.1 VT5.3 | length 8.7
  Bottom Layer w0.25: R22.1 61.669,72.525 61.991,72.203 61.991,72.18 62.596,71.575 VT5.3 62.575,70.584 62.575,65.775 62.4,65.6 R4.2
D_IN2: R4.3 R29.1 VT7.3 | length 11.4
  Bottom Layer w0.25: R4.3 63.232,64.382 63.232,65.007 63.625,65.4 66.175,65.4 66.462,65.687 VT7.3 66.462,71.575 65.857,72.18 65.857,72.203 65.535,72.525 R29.1
D_OUT0: R5.1 R19.2 VT2.1 | length 5.5
  Bottom Layer w0.25: VT2.1 71.186,68.113 71.186,67.536 71.025,67.375 71.025,66.6 R19.2 71.05,65.675 71.3,65.425 72.6,65.425 72.925,65.1 R5.1
D_OUT1: R5.2 R24.2 VT4.1 | length 4.4
  Bottom Layer w0.25: R5.2 73.725,65.25 75.144,66.669 VT4.1
D_OUT2: R5.3 R31.2 VT6.1 | length 7.8
  Bottom Layer w0.25: R5.3 74.525,65.075 74.95,65.5 78.45,65.5 79.01,66.06 VT6.1
DEBUG_RX: D1.43 E62.1 R7.1 | length 22.5
  Bottom Layer w0.25: D1.43 78.819,55.75 82.475,55.75 R7.1 ; E62.1 88.9,25.075 89.925,26.1 89.925,37.3 90.1,37.475
DEBUG_TX: D1.42 E61.1 | length 19.1
  Bottom Layer w0.25: D1.42 78.637,56.275 79.8,56.275 ; 90.625,37.15 90.575,37.1 90.575,23.725 E61.1
ENa: D1.37 E56.1 | length 31.2
  Bottom Layer w0.25: D1.37 77.901,59.075 101.12,59.075 101.775,58.42 E56.1
ENb: D1.38 E57.1 | length 31.5
  Bottom Layer w0.25: D1.38 78.008,58.475 91.155,58.475 93.75,55.88 E57.1
ENBTN: D1.39 E58.1 | length 32
  Bottom Layer w0.25: D1.39 78.24,58 90.2,58 94.86,53.34 E58.1
GND: C1.1 C2.1 C4.1 C5.1 C6.1 C7.1 C8.1 C9.1 C10.1 C11.2 C12.2 C13.1 C14.1 C15.1 C16.1 C17.1 C18.1 C19.1 C20.1 C21.1 C22.1 C23.1 C24.1 C25.1 C26.1 C27.1 C28.1 C29.1 C30.1 C31.1 C32.1 C33.1 C34.1 C35.1 C36.1 C37.1 C38.1 C39.1 C40.1 C41.1 C42.1 C43.1 C44.1 C45.1 C46.1 D1.12 D1.18 D1.31 D1.47 D1.63 D2.2 D3.2 D4.2 D5.2 D6.2 D7.2 D8.2 D9.2 D10.2 D11.2 D12.2 D13.2 DA1.2 E1.1 E2.1 E3.1 E4.1 E5.1 E6.1 E7.1 E8.1 E9.1 E10.1 E11.1 E12.1 E13.1 E14.1 E15.1 E16.1 E17.1 E18.1 E41.1 E42.1 E43.1 E44.1 E69.1 E70.1 E71.1 E72.1 E73.1 E74.1 E75.1 E76.1 E79.1 HG1.7 R2.1 R8.1 R13.1 R16.1 R19.1 R21.1 R24.1 R28.1 R31.1 VD2.1 VD3.1 VD4.1 VD5.1 VD6.1 VD7.1 VD8.1 VD9.1 VT1.2 VT2.2 VT3.2 VT4.2 VT5.2 VT6.2 VT7.2 ZQ1.2 ZQ1.4 | length 122.7
  Bottom Layer w0.25: VT3.2 57.78,67.379 v1(57.782,67.377) 57.832,67.327 57.832,66.627 R16.1@57.882,66.577 ; C14.1@58.1,27.95 58.1,27.927 58.374,27.653 58.397,27.653 59.12,26.93 ; HG1.7 59.12,26.93 ; C13.1 59.775,27.902 59.501,27.628 59.478,27.628 59.12,27.27 59.12,26.93 ; VT5.2@61.648,68.203 61.648,67.377 v1(61.65,67.375) 61.7,67.325 61.7,66.625 R21.1 ; C5.1 62.734,52.781 63.121,52.781 63.226,52.886 64.765,52.886 D1.18 66.651,51 66.75,51 ; C10.1 63.062,45.419 64.245,45.419 D1.12 ; VT7.2 65.512,67.379 v1(65.514,67.377) 65.564,67.327 65.564,66.627 R28.1@65.614,66.577 ; 68.076,49.25 68.25,49.25 ; VT2.2 69.378,67.379 v1(69.38,67.377) 69.43,67.327 69.43,66.627 R19.1@69.48,66.577 ; C6.1 69.467,58.817 69.567,58.817 69.583,58.8 69.246,58.464 69.246,57.597 D1.31 72.118,54.725 72.125,54.725 ; 72.225,45.6 72.225,45.426 D1.63 ; VT4.2 73.244,67.379 v1(73.246,67.377) 73.296,67.327 73.296,66.627 R24.1@73.346,66.577 ; 76.35,50.325 76.35,50.453 D1.47 79.397,53.5 80.137,53.5 80.529,53.108 C9.1 ; VT6.2 77.11,67.379 v1(77.112,67.377) 77.162,67.327 77.162,66.627 R31.1@77.212,66.577
  Bottom Layer w0.7: E1.1 E2.1 E3.1 E4.1 E5.1 E6.1 E7.1 E8.1 E9.1 E10.1 E11.1 E12.1 ; D6.2 v1@43.374,38.299 ; C4.1 91.225,65.96 91.51,65.675 93.015,65.675 93.425,65.265 93.425,64.375 94.175,63.625 C2.1 97.575,63.625 99.05,65.1 101.3,65.1 ; DA1.2 100.6,67.63 101.18,67.05 101.18,66.985 101.235,66.93 C1.1 101.3,65.1 ; E43.1 E44.1 ; E13.1 E14.1 E15.1 E16.1 E17.1 E18.1 E74.1 E70.1 E69.1 E73.1 E72.1 E44.1 ; 101.3,65.1 102.85,63.55 106.63,63.55 E41.1 E44.1
  other v1: 43.375,38.3 65.125,38.425
I2C_SCL: D1.61 E67.1 R10.1 | length 5.8
  Bottom Layer w0.25: D1.61 76.565,42.5 77.275,42.5 78.297,41.478 R10.1
I2C_SDA: D1.62 E68.1 R11.1 | length 4.5
  Bottom Layer w0.25: D1.62 76.689,41.669 R11.1
LIGHT: D1.58 R12.2 | length 9.5
  Bottom Layer w0.25: D1.58 76.886,44.3 79.894,44.3 82.189,42.005 82.189,41.364 R12.2
MIDI_Rx: D1.52 E66.1 R9.1 | length 33.4
  Bottom Layer w0.25: D1.52 78.204,47.225 82.775,47.225 88.2,41.8 R9.1 88.223,40.95 88.545,40.628 88.545,40.605 96.13,33.02 E66.1
MIDI_Tx: D1.51 E65.1 | length 31.7
  Bottom Layer w0.25: D1.51 78.461,47.675 83.275,47.675 95.39,35.56 E65.1
NetC2_2: C2.2 DA1.4 | length 2.5
  Bottom Layer w0.25: C2.2 96.25,65.5 95.9,65.5 95.825,65.575 95.825,66.476 95.971,66.623 96.463,66.623 DA1.4
NetC3_1: C3.1 DA1.5 R1.1 R2.2 | length 5.6
  Bottom Layer w0.25: C3.1@93.025,67.075 R1.1@94.675,67.075 ; R2.2 94.675,65.337 R1.1@94.675,67.075 ; R1.1@94.737,67.075 R1.1@94.675,67.075 ; DA1.5 96.475,67.585 95.91,67.585 95.4,67.075 R1.1@94.675,67.075
NetC10_2: C10.2 D1.13 R3.2 | length 4.2
  Bottom Layer w0.25: C10.2 64.436,46.631 64.986,47.181 65.3,47.181 D1.13
  Bottom Layer w0.7: R3.2 63.007,47.783 64.159,46.631 C10.2
NetC11_1: C11.1 D1.5 ZQ1.3 | length 7
  Bottom Layer w0.25: C11.1 67,41.075 66.678,41.397 ZQ1.3 65.961,42.185 D1.5
NetC12_1: C12.1 D1.6 ZQ1.1 | length 10.1
  Bottom Layer w0.25: C12.1 62.953,39.65 63.305,39.297 ZQ1.1 64.386,39.622 64.447,39.622 65,40.175 65,41.931 D1.6
NetC14_2: C14.2 HG1.8 | length 2.8
  Bottom Layer w0.25: C14.2@56.45,27.95 56.45,26.322 57.12,25.652 HG1.8
NetC19_2: C19.2 D2.1 R26.1
NetC20_2: C20.2 D3.1 R26.2
NetC35_2: C35.2 D8.1 R26.3
NetC36_2: C36.2 D9.1 R26.4
NetD1_1: D1.1 E49.1 | length 7.7
  Bottom Layer w0.25: D1.1 69.925,43.321 69.925,43 70.825,42.1 70.825,36.65
NetD2_3: D2.3 D2.4 E27.1 | length 19
  Bottom Layer w0.25: E27.1 26.465,53.34 31.025,57.9 38.6,57.9 39.397,58.697 D2.4 D2.3
NetD3_3: D3.3 D3.4 E28.1 | length 19.5
  Bottom Layer w0.25: E28.1 27.73,55.88 33.4,61.55 39.01,61.55 39.354,61.894 39.354,62.047 39.561,62.255 D3.4 D3.3
NetD4_1: D4.1 E19.1 VD2.3 | length 18
  Bottom Layer w0.25: E19.1 27.237,31.183 VD2.3 40.308,31.183 41.258,32.133 D4.1
NetD4_3: D4.3 D4.4 R25.1 | length 11
  Bottom Layer w0.25: D4.4 D4.3 43.783,30.233 44.5,30.95 44.5,34.1 45.61,35.21 R25.1
NetD5_1: D5.1 E20.1 VD3.3 | length 17.5
  Bottom Layer w0.25: E20.1 26.219,34.741 VD3.3 40.341,34.741 41.291,35.691 D5.1
NetD5_3: D5.3 D5.4 R25.2 | length 8.6
  Bottom Layer w0.25: D5.4 D5.3 43.316,33.791 43.9,34.375 43.9,35.325 44.585,36.01 R25.2
NetD6_1: D6.1 E21.1 VD4.3 | length 17.3
  Bottom Layer w0.25: E21.1 25.599,38.299 VD4.3 40.474,38.299 41.361,39.186 42.152,39.186 D6.1
NetD6_3: D6.3 D6.4 R25.3 | length 7.3
  Bottom Layer w0.25: D6.4 D6.3 43.876,37.349 44.415,36.81 R25.3
NetD7_1: D7.1 E22.1 VD5.3 | length 17.7
  Bottom Layer w0.25: E22.1 26.617,41.857 VD5.3 40.207,41.857 41.157,42.807 D7.1
NetD7_3: D7.3 D7.4 R25.4 | length 9.8
  Bottom Layer w0.25: D7.4 D7.3 43.893,40.907 44.35,40.45 44.35,38.1 44.84,37.61 R25.4
NetD8_3: D8.3 D8.4 E29.1 | length 19.9
  Bottom Layer w0.25: E29.1 27.495,58.42 34.175,65.1 38.475,65.1 39.101,65.726 39.628,65.726 D8.4 D8.3
NetD9_3: D9.3 D9.4 E30.1 | length 20.3
  Bottom Layer w0.25: E30.1 26.46,60.96 34.2,68.7 38.25,68.7 38.925,69.375 42.21,69.375 D9.3
NetD10_1: D10.1 E23.1 VD6.3 | length 18.1
  Bottom Layer w0.25: E23.1 27.635,45.415 VD6.3 36.105,45.4 40.275,45.4 41.24,46.365 D10.1
NetD10_3: D10.3 D10.4 R32.1
NetD11_1: D11.1 E24.1 VD7.3 | length 18.6
  Bottom Layer w0.25: E24.1 28.653,48.973 VD7.3 40.373,48.973 41.323,49.923 D11.1
NetD11_3: D11.3 D11.4 R32.2
NetD12_1: D12.1 E25.1 VD8.3 | length 19
  Bottom Layer w0.25: E25.1 29.671,52.531 VD8.3 40.356,52.531 41.306,53.481 D12.1
NetD12_3: D12.3 D12.4 R32.3
NetD13_1: D13.1 E26.1 VD9.3 | length 19.4
  Bottom Layer w0.25: E26.1 30.689,56.089 VD9.3 40.364,56.089 41.314,57.039 D13.1
NetD13_3: D13.3 D13.4 R32.4
NetE31_1: E31.1 R15.1 | length 2.6
  Bottom Layer w0.25: R15.1 59.68,74.92 E31.1
NetE32_1: E32.1 R20.1 | length 2
  Bottom Layer w0.25: E32.1 63.5,74.221 R20.1
NetE33_1: E33.1 R27.1 | length 2.6
  Bottom Layer w0.25: E33.1 67.412,74.828 R27.1
NetE34_1: E34.1 R18.1 VT2.3 | length 4
  Bottom Layer w0.25: R18.1 69.401,74.175 69.723,73.853 69.723,73.83 70.328,73.225 VT2.3
NetE35_1: E35.1 R23.1 VT4.3 | length 4
  Bottom Layer w0.25: R23.1 73.267,74.175 73.541,73.901 73.541,73.878 74.194,73.225 VT4.3
NetE36_1: E36.1 R30.1 VT6.3 | length 4
  Bottom Layer w0.25: R30.1 77.133,74.175 77.407,73.901 77.407,73.878 78.06,73.225 VT6.3
NetR12_1: R12.1 R13.2 VT1.1 | length 3.2
  Bottom Layer w0.25: VT1.1 81.85,39.375 R12.1 83.55,39.45 R13.2
NetR14_1: R14.1 VD1.2
NetR15_2: R15.2 R16.2 VT3.1 | length 6
  Bottom Layer w0.25: R16.2 59.615,66.64 59.615,68.14 VT3.1 R15.2
NetR20_2: R20.2 R21.2 VT5.1 | length 6
  Bottom Layer w0.25: R21.2 63.546,66.721 VT5.1 R20.2
NetR27_2: R27.2 R28.2 VT7.1 | length 6
  Bottom Layer w0.25: R28.2 67.412,66.687 VT7.1 R27.2
NetVD1_1: VD1.1 VT1.3 | length 12.6
  Top Layer w0.25: v1(82.75,34.4) 82.8,34.45 v1(87.575,34.45)
  Bottom Layer w0.25: v1(82.75,34.4) 82.75,35.45 VT1.3 ; VD1.1 87.575,28.335 v1(87.575,34.45)
NRST: D1.7 E81.1 R6.2 | length 3.3
  Bottom Layer w0.25: D1.7 68.97,46.608 69.083,46.608 v1(69.15,46.675) ; E81.1 73.66,24.91 R6.2
PA8: D1.41 E60.1 | length 32.8
  Bottom Layer w0.25: D1.41 78.58,56.925 88.9,56.925 97.565,48.26 E60.1
PA11: D1.44 E63.1 | length 31.8
  Bottom Layer w0.25: D1.44 78.976,55.2 81.6,55.2 84.387,52.412 91.563,52.412 98.255,45.72 E63.1
PA12: D1.45 E64.1 | length 32.2
  Bottom Layer w0.25: D1.45 79.183,54.7 81.375,54.7 84.175,51.9 91.2,51.9 99.92,43.18 E64.1
PA15: D1.50 E52.1 | length 26.3
  Bottom Layer w0.25: D1.50 78.718,48.125 83.725,48.125 86.775,45.075 ; 91.35,35.85 91.35,32.1 97.775,25.675 97.775,25.2 96.52,23.945 E52.1
PB0: D1.26 R4.8 | length 10.4
  Bottom Layer w0.25: R4.8 61.602,62.648 61.602,61.706 D1.26
PB1: D1.27 R4.7 | length 9.8
  Bottom Layer w0.25: R4.7 62.402,62.648 62.402,61.613 D1.27
PB2: D1.28 R4.6 | length 9.3
  Bottom Layer w0.25: R4.6 63.202,62.648 63.202,61.52 D1.28
PB4: D1.56 E53.1 | length 56
  Top Layer w0.25: v1(64.25,27.05) 64.263,27.063 72.538,27.063 v1(72.55,27.075)
  Bottom Layer w0.25: v1(64.25,27.05) 69.55,32.35 83.466,32.35 85.275,34.159 85.275,41.8 81.7,45.375 77.225,45.375 D1.56 ; E53.1 72.525,24.265 72.525,27.05 v1(72.55,27.075)
PB10: D1.29 R5.8 | length 12.1
  Bottom Layer w0.25: D1.29 67.075,58.354 67.075,59.825 68.7,61.45 72.425,61.45 72.925,61.95 R5.8
PB11: D1.30 R5.7 | length 11.6
  Bottom Layer w0.25: D1.30 67.975,58.161 67.975,59.45 69.443,60.918 73.443,60.918 73.725,61.2 R5.7
PB12: D1.33 R5.6 | length 6
  Bottom Layer w0.25: D1.33 73.595,57.597 73.595,59.751 74.525,60.681 R5.6
PB13: D1.34 E48.1 | length 22.9
  Bottom Layer w0.25: D1.34 80.425,63.72 80.425,74.2 78.725,75.9 78.725,76.185 E48.1
PB14: D1.35 E54.1 | length 22.8
  Bottom Layer w0.25: D1.35 81.28,63.868 E54.1
PB15: D1.36 E55.1 | length 24.1
  Bottom Layer w0.25: D1.36 83.82,65.701 E55.1
PC9: D1.40 E59.1 | length 32.3
  Bottom Layer w0.25: D1.40 78.348,57.4 89.625,57.4 96.225,50.8 E59.1
PC13: D1.2 E45.1 | length 8.1
  Bottom Layer w0.25: D1.2 69.475,43.578 69.475,42.8 70.375,41.9 70.375,36.65
PC14: D1.3 E50.1 | length 8.5
  Bottom Layer w0.25: D1.3 69.025,43.835 69.025,42.614 69.925,41.714 69.925,36.65
PC15: D1.4 E51.1 | length 8.9
  Bottom Layer w0.25: D1.4 68.575,44.092 68.575,42.427 69.475,41.527 69.475,36.65
PС4: D1.24 E46.1 | length 27.7
  Bottom Layer w0.25: E46.1 53.34,68.553 D1.24
PС5: D1.25 E47.1 | length 27.3
  Bottom Layer w0.25: E47.1 54.88,75.2 54.88,67.72 D1.25
R\E\S\: D1.59 HG1.2 | length 43.6
  Top Layer w0.25: v1(63.325,28.375) v1(69.15,28.375)
  Bottom Layer w0.25: v1(63.325,28.375) 68.375,33.425 80,33.425 80.8,34.225 80.8,41.675 78.8,43.675 76.804,43.675 D1.59 ; HG1.2 69.12,28.345 v1(69.15,28.375)
SPI_MOSI: D1.57 HG1.5 | length 44.8
  Bottom Layer w0.25: HG1.5 63.12,27.286 68.634,32.8 83.279,32.8 84.825,34.346 84.825,41.55 81.5,44.875 77.018,44.875 D1.57
SPI_SCK: D1.55 HG1.4 | length 44.7
  Bottom Layer w0.25: HG1.4 65.12,27.284 69.736,31.9 83.652,31.9 85.725,33.973 85.725,41.986 81.886,45.825 77.483,45.825 D1.55
SWCLK: D1.49 E78.1 | length 10.5
  Bottom Layer w0.25: D1.49 78.975,48.575 84.725,48.575 87.575,45.725
SWDIO: D1.46 E80.1 | length 8.5
  Bottom Layer w0.25: D1.46 79.39,54.2 81.15,54.2 83.45,51.9 83.45,50.825 83.5,50.775
VCC_3V3: C3.2 C4.2 C5.2 C6.2 C7.2 C8.2 C9.2 C13.2 C15.2 C16.2 C17.2 C18.2 C25.2 C26.2 C27.2 C28.2 C29.2 C30.2 C31.2 C32.2 C33.2 C34.2 C37.2 C38.2 C39.2 C40.2 C41.2 C42.2 D1.19 D1.32 D1.48 D1.64 D2.5 D3.5 D4.5 D5.5 D6.5 D7.5 D8.5 D9.5 D10.5 D11.5 D12.5 D13.5 DA1.6 HG1.6 J1.1 R1.2 R3.1 R6.1 R7.2 R9.2 R10.2 R11.2 R14.2 R17.2 R22.2 R29.2 VD2.2 VD3.2 VD4.2 VD5.2 VD6.2 VD7.2 VD8.2 VD9.2 | length 66.9
  Top Layer w0.6: v1(56.85,74.175) v1(64.582,74.175) 67.782,70.975 87.8,70.975 v1(90.2,68.575)
  Bottom Layer w0.25: HG1.6 61.12,27.513 61.425,27.818 C13.2 ; C5.2 63.96,53.889 64.469,53.889 D1.19 ; D1.32@70.126,57.424 69.95,57.6 69.95,58.325 70.733,59.108 70.733,59.983 70.633,59.983 C6.2 ; D1.64 74.954,41.989 74.954,40.563 C8.2 75.954,39.521 R10.2 ; D1.48 79.229,52.625 79.825,52.625 80.95,51.5 81.262,51.5 81.704,51.942 C9.2
  Bottom Layer w0.6: v1(56.85,74.175) R17.2 ; v1(60.716,74.175) R22.2 ; v1(64.582,74.175) R29.2
  Bottom Layer w0.7: C7.2 60.592,47.817 61.792,46.617 R3.1 ; v1(90.2,68.575) 91.22,68.575 C4.2 C3.2 R1.2 DA1.6
  other v1: 38.75,39.225
VCC_5V: C1.2 DA1.1 DA1.3 E37.1 E38.1 E39.1 E40.1 R18.2 R23.2 R30.2 | length 51.7
  Top Layer w0.25: v1(68.448,72.525) v1(72.314,72.525) v1(76.18,72.525) 89.05,72.525 93,68.575 v1(100.275,68.575) v1(100.275,66.675)
  Bottom Layer w0.25: DA1.3 100.27,66.68 v1(100.275,66.675)
  Bottom Layer w0.6: v1(68.448,72.525) R18.2 ; v1(72.314,72.525) R23.2 ; v1(76.18,72.525) R30.2
  Bottom Layer w0.7: DA1.1 99.275,68.575 v1(100.275,68.575) 100.28,68.58 C1.2 E40.1 E37.1 E38.1 E39.1
Vref: E77.1 J1.2 | length 2.1
  Bottom Layer w0.25: E77.1 83.82,24.92 J1.2
pads on no net: HG1.A R4.4 R4.5 R5.4 R5.5

## Polygon pours and split planes (outlines as drawn)
GND on Bottom Layer "signal" (solid, pour order 0): 61,42.8 61,38 69,38 69,41.5 67.7,42.8
GND on Bottom Layer "signal" (solid, remove dead copper, pour order 1): 71.75,43.5 65.75,49.5 65.75,51.5 71.75,57.5 78.75,50.5

## Keep-outs
Keep-Out Layer:
  circle w0.25: c25,25 r5
  circle w0.25: c25,75 r5
  circle w0.25: c105,75 r5
  circle w0.25: c105,25 r5

## Silkscreen, mask and mechanical layers (free items; w line width, h text height)
Top Overlay:
  lines w0.15: 32.588,77.55 33.463,77.55 ; 33.013,77.575 33.013,78.3 ; 83.388,77.55 84.263,77.55 ; 83.813,77.575 83.813,78.3 ; 91.008,77.55 91.883,77.55 ; 91.433,77.575 91.433,78.3 ; 98.628,77.55 99.503,77.55 ; 99.053,77.575 99.053,78.3
  lines w0.2: 42.155,72.95 42.155,76.225 ; 49.285,72.96 49.285,76.2 ; 62.475,80.57 62.475,83.845 ; 67.065,80.58 67.065,83.82 ; 77.715,72.95 77.715,76.225 ; 100.085,72.96 100.085,76.2
  lines w0.25: 22.86,34.02 22.86,34.55 ; 22.86,36.56 22.86,37.09 ; 22.86,39.1 22.86,39.63 ; 22.86,41.64 22.86,42.17 ; 22.86,44.18 22.86,44.71 ; 22.86,46.72 22.86,47.25 ; 22.86,49.26 22.86,49.79 ; 22.86,51.8 22.86,52.33 ; 22.86,54.34 22.86,54.87 ; 22.86,56.88 22.86,57.41 ; 22.86,59.42 22.86,59.95 ; 104.14,61.96 104.14,62.49 ; 104.14,67.04 104.14,67.57 ; 105.14,60.96 105.67,60.96 ; 105.14,63.5 105.67,63.5 ; 105.14,66.04 105.67,66.04 ; 105.14,68.58 105.67,68.58 ; 106.68,34.02 106.68,34.55 ; 106.68,36.56 106.68,37.09 ; 106.68,39.1 106.68,39.63 ; 106.68,41.64 106.68,42.17 ; 106.68,44.18 106.68,44.71 ; 106.68,46.72 106.68,47.25 ; 106.68,49.26 106.68,49.79 ; 106.68,51.8 106.68,52.33 ; 106.68,54.34 106.68,54.87 ; 106.68,56.88 106.68,57.41 ; 106.68,59.42 106.68,59.95 ; 106.68,61.96 106.68,62.49 ; 106.68,67.04 106.68,67.57
  text "C14" at 43.18,86.36 h2
  text "BAT" at 44.214,85.42 h2
  text "B14" at 47.261,85.42 h2
  text "B15" at 49.885,85.42 h2
  text "C9" at 52.715,85.42 h2
  text "A8" at 54.915,85.42 h2
  text "A11" at 57.326,85.42 h2
  text "A12" at 60.053,85.42 h2
  text "C5" at 62.99,85.42 h2
  text "Tx" at 65.34,85.42 h2
  text "Rx" at 67.88,85.42 h2
  text "A14" at 70.14,85.42 h2
  text "A15" at 72.926,85.42 h2
  text "B4" at 75.606,85.42 h2
  text "C13" at 77.76,85.42 h2
  text "RST" at 80.265,85.42 h2
  text "IO" at 83.39,85.42 h2
  text "MIDI" at 63.55,81.37 h2
  text "C4" at 34.75,77.8 h2
  text "C15" at 36.743,77.8 h2
  text "CLK" at 85.4,77.8 h2
  text "Vref" at 87.95,77.8 h2
  text "Rx" at 93.4,77.8 h2
  text "Tx" at 95.825,77.8 h2
  text "DEBUG" at 81.1,73.775 h2
Board Shape:
  the board outline again, w0.3

## Text inside footprints (layer, text, board x,y; h text height)
HG1: Top Overlay "MT-12864B" at 61.62,47.4 h1.52
VD1: Top Overlay "K" at 86.68,24.94 h1.52; Top Overlay "A" at 42.68,24.94 h1.52